# Altium PCB Electronic load HMI 1.0.PcbDoc
Units mil, origin at the board's own origin, x right, y up, seen from the top; angles counter-clockwise.
Board outline 2057.27 x 3159.64 mil, 2 copper layers (Top Layer, Bottom Layer), stack 63.824 mil thick; 86 components, 62 nets, 288 pads, 122 vias.
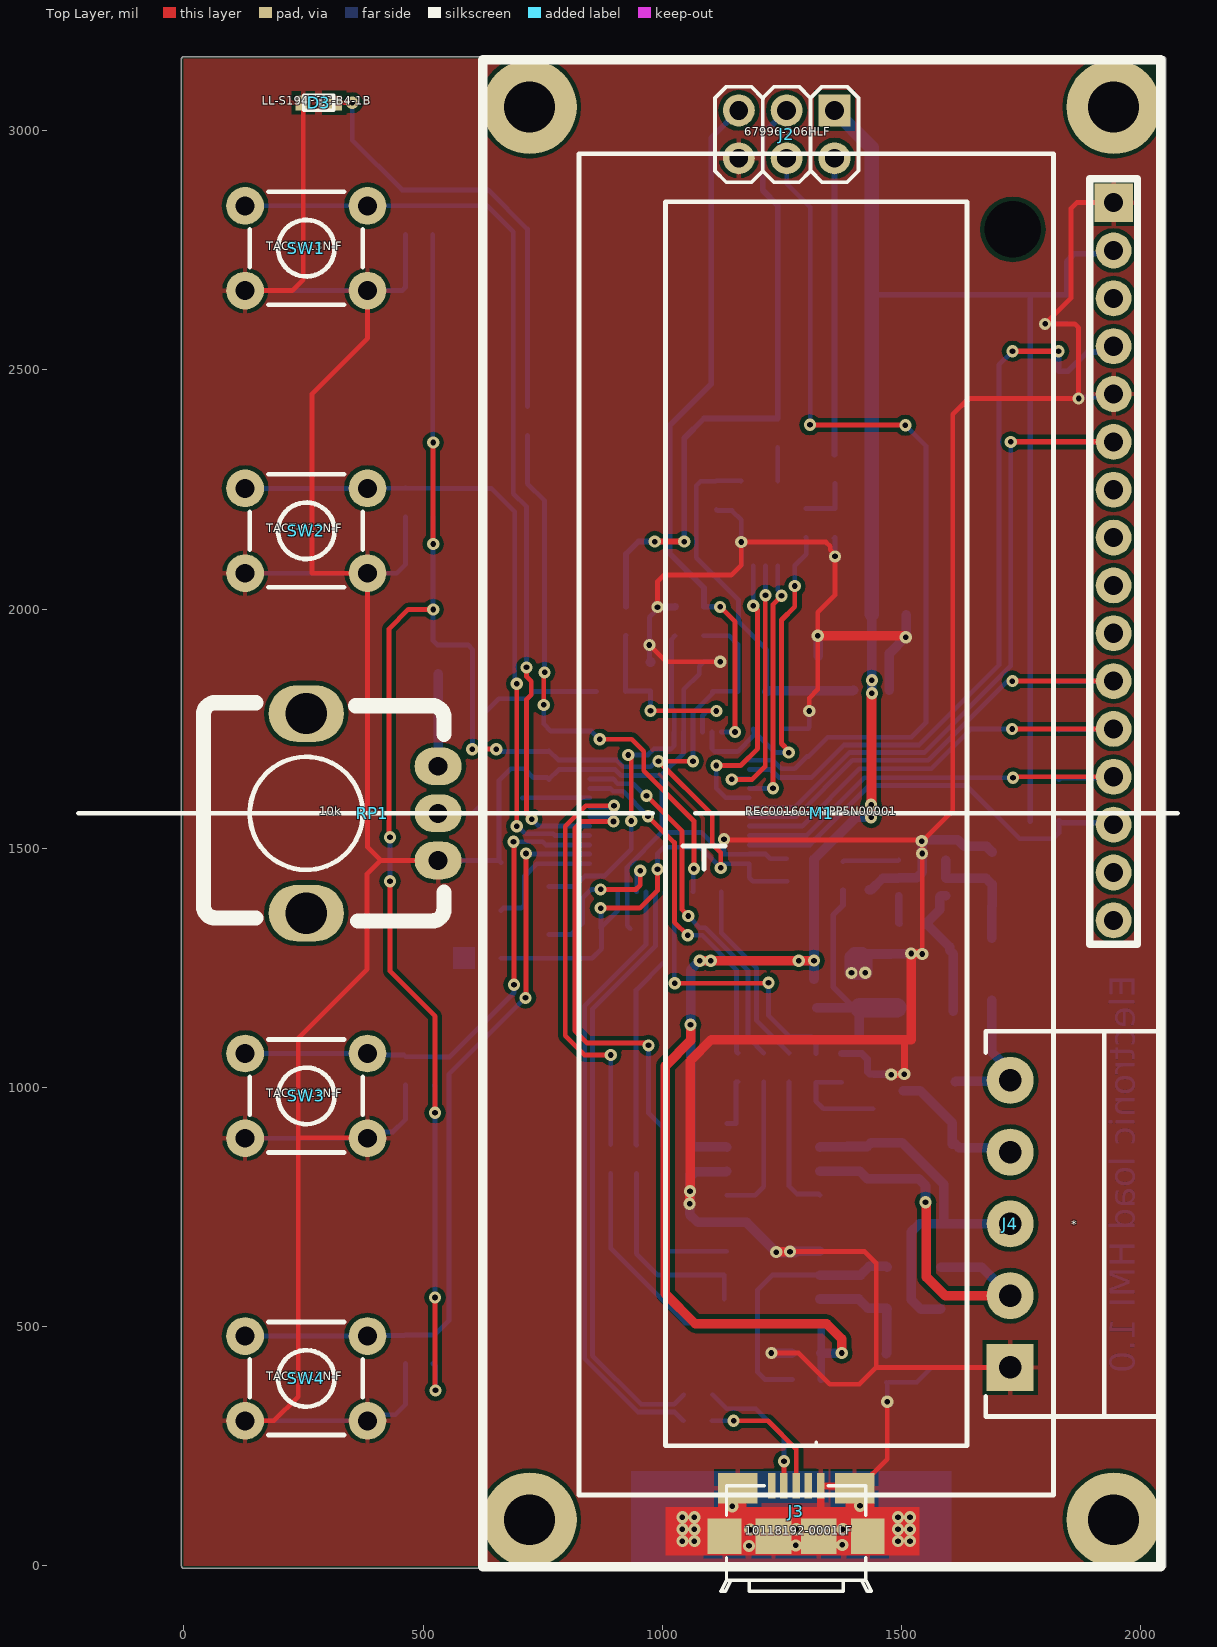
[diagram p0: Top Layer view]
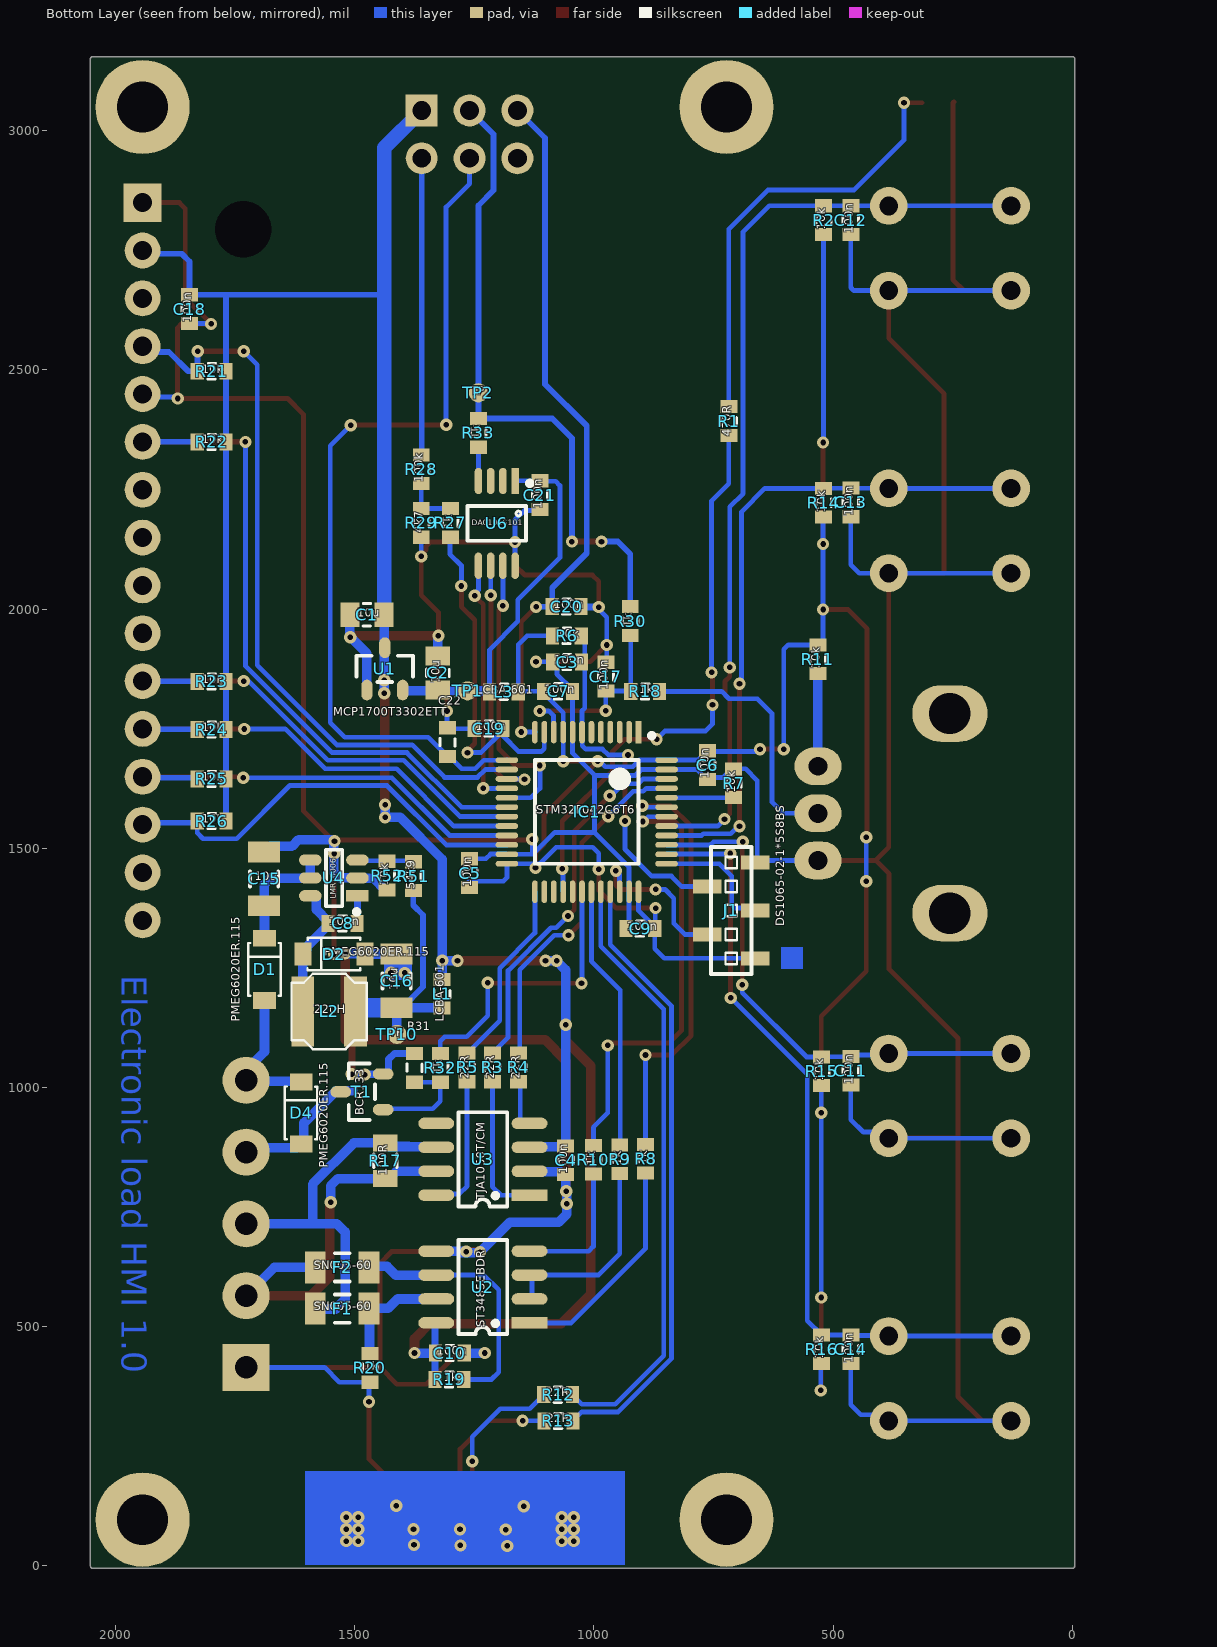
[diagram p1: Bottom Layer view, seen from below]

## Layer stack, top to bottom
Top Solder: solder mask 0.4, Solder Resist, Dk 3.5
Top Layer: signal copper 1.4
Dielectric1: core 61.0236, FR-4, Dk 4.2
Bottom Layer: signal copper 1.4
Bottom Solder: solder mask 0.4, Solder Resist, Dk 3.5

## Board outline
-5.02,0 ccw(c0,0) 0,-5.02 2047.24,-5.02 ccw(c2047.24,0) 2052.26,0 2052.26,3149.61 ccw(c2047.24,3149.61) 2047.24,3154.62 0,3154.62 ccw(c0,3149.61) -5.02,3149.61

## Design rules (kind name [scope] priority, off if disabled: settings)
Clearance kwarc [HasFootprint('X2016')] p1: gap=6 ignorepadtopadclearanceinfootprint=FALSE except(0: Arc-Hole Track-Hole SMDPad-Hole THPad-Hole Via-Hole Fill-Hole Poly-Hole Region-Hole Text-Hole)
Clearance led [HasFootprint('LED1206REV')] p2: gap=5.9 ignorepadtopadclearanceinfootprint=FALSE except(0: Arc-Hole Track-Hole SMDPad-Hole THPad-Hole Via-Hole Fill-Hole Poly-Hole Region-Hole Text-Hole)
Clearance Clearance_1 [(OnLayer('Keep-Out Layer'))] p3: gap=10 ignorepadtopadclearanceinfootprint=FALSE except(0: Arc-Hole Track-Hole SMDPad-Hole THPad-Hole Via-Hole Fill-Hole Poly-Hole Region-Hole Text-Hole)
Clearance Track [istrack vs istrack] p4: gap=6 ignorepadtopadclearanceinfootprint=FALSE except(0: Arc-Hole Track-Hole SMDPad-Hole THPad-Hole Via-Hole Fill-Hole Poly-Hole Region-Hole Text-Hole)
Clearance ANT [InNetClass('ANT')] p5: gap=7.87 ignorepadtopadclearanceinfootprint=FALSE except(0: Arc-Hole Track-Hole SMDPad-Hole THPad-Hole Via-Hole Fill-Hole Poly-Hole Region-Hole Text-Hole)
Clearance poly [inpoly] p6: gap=9 ignorepadtopadclearanceinfootprint=FALSE except(0: Arc-Hole Track-Hole SMDPad-Hole THPad-Hole Via-Hole Fill-Hole Poly-Hole Region-Hole Text-Hole)
Clearance [All] p7: gap=7 ignorepadtopadclearanceinfootprint=FALSE except(0: Arc-Hole Track-Hole SMDPad-Hole THPad-Hole Via-Hole Fill-Hole Poly-Hole Region-Hole Text-Hole)
ComponentClearance ComponentClearance_2 [HasFootprint('CR123')] p1: gap=0 collisioncheckmode=3 verticalgap=0 showdistances=TRUE
ComponentClearance ComponentClearance_1 [HasFootprint('ANT1')] p2: gap=0 collisioncheckmode=3 verticalgap=0 showdistances=TRUE
ComponentClearance [All] p3: gap=0 collisioncheckmode=3 verticalgap=0 showdistances=FALSE
HoleSize [All] p1: absolutevalues=TRUE maxlimit=500 minlimit=10 maxpercent=80.000 minpercent=20.000
PolygonConnect CR123 [HasFootprint('CR123')] p1: connectstyle=Relief reliefconductorwidth=20 reliefentries=4 polygonreliefangle="90 Angle" airgapwidth=10
PolygonConnect coax [HasFootprint('COAXIAL-SWF')] p2: connectstyle=Direct reliefconductorwidth=10 reliefentries=4 polygonreliefangle="90 Angle" airgapwidth=10
PolygonConnect PolygonConnect_1 [isvia] p3: connectstyle=Direct reliefconductorwidth=10 reliefentries=4 polygonreliefangle="90 Angle" airgapwidth=10
PolygonConnect [All] p4: connectstyle=Relief reliefconductorwidth=10 reliefentries=4 polygonreliefangle="90 Angle" airgapwidth=8
RoutingVias [All] p1: holewidth=11.81 width=25.59 viastyle="Through Hole" minholewidth=11.81 minwidth=25.59 maxholewidth=11.81 maxwidth=25.59
SolderMaskExpansion SolderMaskExpansion_1 [isvia] p1: expansion=-100
SolderMaskExpansion [All] p2: expansion=2
Width [All] p1: maxlimit=200 minlimit=6 preferedwidth=10 minimp=50.000000 maximp=50.000000 favimp=50.000000
28 further rules are at their usual default settings.

## Components (designator, comment, footprint, x,y, rotation, side; value= is the part's Value field where it differs from the comment)
C1 "10u" C0805-10 1474.4,1988 r0 bottom
C2 "10u" C0805-10 1326,1866.43 r90 bottom
C3 "100n" C0603 1056,1889 r180 bottom
C4 "100n" C0603 1059,848 r270 bottom
C5 "100n" C0603 1259.84,1448 r270 bottom
C6 "100n" C0603 763,1674 r90 bottom
C7 "100n" C0603 1075,1828 r0 bottom
C8 "100n" C0603 1525.41,1343 r0 bottom
C9 "100n" C0603 903,1332 r180 bottom
C10 "100n" C0603 1300.94,445 r180 bottom
C11 "100n" C0603 463,1035 r270 bottom
C12 "100n" C0603 463,2813 r270 bottom
C13 "100n" C0603 463,2223 r270 bottom
C14 "100n" C0603 463,453 r270 bottom
C15 "10u" C1206 1689.41,1436.1 r90 bottom
C16 "10u" C1206 1412.41,1222.9 r90 bottom
C17 "100n" C0603 975,1858.85 r270 bottom
C18 "100n" C0603 1845,2627 r90 bottom
C19 "100n" C0603 1220,1750 r0 bottom
C20 "100n" C0603 1057,2005 r180 bottom
C21 "100n" C0603 1112.78,2238 r270 bottom
C22 "100n" C0603 1306,1722 r90 bottom
D1 "PMEG6020ER.115" SOD123 1688.41,1247 r270 bottom
D2 "PMEG6020ER.115" SOD123 1543.41,1279 r180 bottom
D3 "LL-S194PBC-B4-1B" LED0603B 282,3058 r180 top
D4 "PMEG6020ER.115" SOD123 1612,946.96 r270 bottom
F1 "SN005-60" F1206 1526.1,538 r0 bottom
F2 "SN005-60" F1206 1526.1,624 r0 bottom
IC1 "STM32F042C6T6" LQFP-48 1015,1576 r270 bottom
J1 "DS1065-02-1*5S8BS" "SIP-5 1.27-SMT -F" 713,1370 r90 bottom
J2 "67996-206HLF" GP2x3 1259.84,2992.13 r180 top locked
J3 "10118192-0001LF" USB-M-H 1279.76,167.31 r0 top
J4 "*" "MC 1,5/5-G-3,81" 1727,1015 r180 top
L1 "LCBA-601" R0603 1317,1196 r90 bottom
L2 "22uH" L4040 1553.29,1159 r180 bottom
L3 "LCBA-601" R0603 1188,1827 r0 bottom
M1 "REC001602AYPP5N00001" LCD16*2 1333,1573 r270 top locked
R1 "470R" R0603 718,2393 r90 bottom
R2 "10k" R0603 520,2812.69 r270 bottom
R3 "22R" R0603 1212,1042 r90 bottom
R4 "22R" R0603 1158,1042 r90 bottom
R5 "22R" R0603 1265,1042 r90 bottom
R6 "10k" R0603 1056.33,1944 r180 bottom
R7 "10k" R0603 708,1636 r270 bottom
R8 "1k" R0603 892,851 r270 bottom
R9 "1k" R0603 946,850 r270 bottom
R10 "1k" R0603 1001,849 r270 bottom
R11 "10k" R0603 532,1895 r90 bottom
R12 "22R" R0603 1075,358 r180 bottom
R13 "22R" R0603 1074,303.31 r180 bottom
R14 "10k" R0603 520,2222.13 r270 bottom
R15 "10k" R0603 524,1034 r270 bottom
R16 "10k" R0603 524,453 r270 bottom
R17 "100R" R0805 1436,847 r90 bottom
R18 "1k" R0603 893,1827.76 r0 bottom
R19 "1k" R0603 1302,390 r180 bottom
R20 "1k" R0603 1468,414 r270 bottom
R21 "10k" R0603 1799,2497 r0 bottom
R22 "10k" R0603 1799,2349.38 r0 bottom
R23 "10k" R0603 1799,1848.72 r0 bottom
R24 "10k" R0603 1799,1748 r0 bottom
R25 "10k" R0603 1799,1645 r0 bottom
R26 "10k" R0603 1799,1557 r0 bottom
R27 "1k" R0603 1300,2180 r90 bottom
R28 "100k" R0603 1360.84,2292.22 r90 bottom
R29 "4k7" R0603 1360.84,2180 r90 bottom
R30 "1k" R0603 924,1975 r270 bottom
R31 "100k" R0603 1375,1041 r270 bottom
R32 "1k" R0603 1321,1041 r270 bottom
R33 "1k" R0603 1241.39,2368 r90 bottom
R51 "54k9" R0603 1377.41,1442 r270 bottom
R52 "10k" R0603 1432.41,1443 r90 bottom
RP1 "10k" RK_POT 255.91,1573 r90 top locked
SW1 "TACT-613N-F" "MSWITCH 13" 255.91,2754.1 r90 top locked
SW2 "TACT-613N-F" "MSWITCH 13" 255.91,2163.55 r90 top locked
SW3 "TACT-613N-F" "MSWITCH 13" 255.91,982.45 r90 top locked
SW4 "TACT-613N-F" "MSWITCH 13" 255.91,391.9 r90 top locked
T1 "BCR133" SOT-23 1484.84,991 r0 bottom
TP1 "TP" TP 1264,1829 r180 bottom
TP2 "TP" TP 1241.39,2452 r180 bottom
TP10 "TP" TP 1411.65,1111 r90 bottom
U1 "MCP1700T3302ETT" SOT-23 1437,1875 r90 bottom
U2 "ST3485EBDR" SO-8 1232,583 r0 bottom
U3 "TJA1050T/CM" SO-8 1232,850 r0 bottom
U4 "LMR16006" SOT-23-6 1543.41,1438 r90 bottom
U6 "DAC101S101" MSOP-8 1203,2179 r270 bottom

## Footprints (in the part's own frame and the unit in brackets; to place one, negate y for a bottom-side part, rotate by r counter-clockwise, add the part's x,y. Pads: shape width x height; smd on the part's side, far side on the other; paste and mask are expansions set on the pad)
C0603 [mm] "Chip Capacitor, Body 1.6x0.8mm, IPC High Density"
  rect 0.7x0.9 smd: 1(-0.762,0) 2(0.762,0)
  silkscreen extent -0.22,-0.41 0.2,0.41, body extent -0.8,-0.4 0.8,0.4, height 0.5
C0805-10 [mm]
  rect 1x1.3 smd: 1(-0.9,0) 2(0.9,0)
  silkscreen extent -0.2,-0.6 0.2,0.6, body extent -1,-0.63 1,0.63, height 1
C1206 [mm]
  rect 1.1x1.7 smd: 1(-1.425,0) 2(1.425,0)
  silkscreen extent -0.4,-0.75 0.4,0.75, body extent -1.6,-0.8 1.6,0.8, height 1
F1206 [mm]
  rect 1.1x1.7 smd: 1(-1.425,0) 2(1.425,0)
  silkscreen extent -0.4,-0.75 0.4,0.75, body extent -1.55,-0.87 1.55,0.87, height 0.7
GP2x3 [mm]
  rect 1.7x1.7 hole 1: 1(-2.54,-1.27)
  round 1.7 hole 1: 2(-2.54,1.27) 3(0,-1.27) 4(0,1.27) 5(2.54,-1.27) 6(2.54,1.27)
  silkscreen extent -3.81,-2.53 3.81,2.54, body extent -3.81,-2.54 3.81,2.54, height 8.52
L4040 [mm]
  rect 1.2x3.7 smd: 1(-1.4,0) 2(1.4,0)
  silkscreen extent -2,-2 2,2, body extent -2,-2 2,2, height 1.1
LCD16*2 [mm]
  round 5 hole 2.7: 0(-37.5,-15.5) 0(-37.5,15.5) 0(37.5,-15.5) 0(37.5,15.5)
  rect 2.032x2.032 hole 1.016: 1(-32.42,15.5)
  round 1.905 hole 1.016: 2(-29.88,15.5) 3(-27.34,15.5) 4(-24.8,15.5) 5(-22.26,15.5) 6(-19.72,15.5) 7(-17.18,15.5) 8(-14.64,15.5) 9(-12.1,15.5) 10(-9.56,15.5) 11(-7.02,15.5) 12(-4.48,15.5) 13(-1.94,15.5) 14(0.6,15.5) 15(3.14,15.5) 16(5.68,15.5)
  silkscreen extent -40,-18 40,18, body extent -40,-18 40,18, height 14.65
LED0603B [mm]
  rect 0.8x0.8 smd mask+0.051: A(-0.825,0) K(0.825,0)
  silkscreen extent -0.8,-0.4 0.8,0.4, body extent -0.8,-0.4 0.8,0.4, height 0.65
LQFP-48 [mm]
  rect 1.2x0.3 smd mask+0.051: 1(-4.237,2.75)
  oval 1.2x0.3 smd mask+0.051: 2(-4.237,2.25) 3(-4.237,1.75) 4(-4.237,1.25) 5(-4.237,0.75) 6(-4.237,0.25) 7(-4.237,-0.25) 8(-4.237,-0.75) 9(-4.237,-1.25) 10(-4.237,-1.75) 11(-4.237,-2.25) 12(-4.237,-2.75) 25(4.237,-2.75) 26(4.237,-2.25) 27(4.237,-1.75) 28(4.237,-1.25) 29(4.237,-0.75) 30(4.237,-0.25) 31(4.237,0.25) 32(4.237,0.75) 33(4.237,1.25) 34(4.237,1.75) 35(4.237,2.25) 36(4.237,2.75)
  oval 0.3x1.2 smd mask+0.051: 13(-2.75,-4.237) 14(-2.25,-4.237) 15(-1.75,-4.237) 16(-1.25,-4.237) 17(-0.75,-4.237) 18(-0.25,-4.237) 19(0.25,-4.237) 20(0.75,-4.237) 21(1.25,-4.237) 22(1.75,-4.237) 23(2.25,-4.237) 24(2.75,-4.237) 37(2.75,4.237) 38(2.25,4.237) 39(1.75,4.237) 40(1.25,4.237) 41(0.75,4.237) 42(0.25,4.237) 43(-0.25,4.237) 44(-0.75,4.237) 45(-1.25,4.237) 46(-1.75,4.237) 47(-2.25,4.237) 48(-2.75,4.237)
  silkscreen extent -4.17,-2.75 2.75,3.57, body extent -4.5,-4.51 4.5,4.49, height 1.56
"MC 1,5/5-G-3,81" [mm]
  rect 2.5x2.5 hole 1.2: 1(0,15.24)
  round 2.5 hole 1.2: 2(0,11.43) 3(0,7.62) 4(0,3.81) 5(0,0)
  silkscreen extent -8,-2.6 1.3,17.84, body extent -8,-2.6 1.3,17.84, height 7.25
MSOP-8 [mm] "MSOP, 8-Leads, Body 3,1x3,1mm (max), Pitch 0,65mm, IPC Medium Density"
  rect 1.4x0.4 smd: 1(-2.25,0.975)
  oval 1.4x0.4 smd: 2(-2.25,0.325) 3(-2.25,-0.325) 4(-2.25,-0.975) 5(2.25,-0.975) 6(2.25,-0.325) 7(2.25,0.325) 8(2.25,0.975)
  silkscreen extent -2.25,-1.55 0.93,1.87, body extent -2.52,-1.55 2.53,1.55, height 1.1
"MSWITCH 13" [mm]
  round 2 hole 1: 1(-2.25,3.25) 1(-2.25,-3.25) 2(2.25,3.25) 2(2.25,-3.25)
  silkscreen extent -3,-3 3,3, body extent -3.1,-3.95 3.1,3.95, height 13
R0603 [mm] "Chip Resistor, Body 1.6x0.8mm, IPC High Density"
  rect 0.7x0.9 smd: 1(-0.762,0) 2(0.762,0)
  silkscreen extent -0.22,-0.41 0.2,0.41, body extent -0.8,-0.4 0.8,0.4, height 0.45
R0805 [mm] "Chip Resistor, Body 2.0x1.3mm, IPC High Density"
  rect 0.9x1.3 smd: 1(-0.95,0) 2(0.95,0)
  silkscreen extent -0.33,-0.61 0.33,0.61, body extent -1,-0.62 1,0.63, height 0.5
RK_POT [mm]
  oval 2x2.5 hole 1: 1(-2.5,-7) 2(0,-7) 3(2.5,-7)
  oval 3x4 hole 2.2: 4(-5.3,0) 5(5.3,0)
  silkscreen extent -5.71,-7.31 5.88,5.46, body extent -5.7,-7.15 5.7,5.5, height 19.91
"SIP-5 1.27-SMT -F" [mil]
  rect 29.13x60 smd: 1(-100,-50) 2(-50,50) 3(0,-50) 4(50,50) 5(100,-50)
  silkscreen extent -133,-42 133,42, body extent -133,-70 133,70, height 187
SO-8 [mil]
  rect 75x24 smd: 1(-97.44,75)
  oval 75x24 smd: 2(-97.44,25) 3(-97.44,-25) 4(-97.44,-75) 5(97.44,-75) 6(97.44,-25) 7(97.44,25) 8(97.44,75)
  silkscreen extent -51,-98 51,98, body extent -123,-98 122,99, height 55
SOD123 [mm]
  rect 0.9x1.2 smd: 1(1.65,0) 2(-1.65,0)
  silkscreen extent -1.4,-0.86 1.4,0.86, body extent -1.85,-0.86 2,0.84, height 1.46
SOT-23 [mm] "SOT23, 3-Leads, Body 3,0x2,5mm (max), Pitch 0,90mm, IPC Medium Density"
  oval 1.1x0.6 smd: 1(-1.125,0.95) 2(-1.125,-0.95) 3(1.125,0)
  silkscreen extent -0.7,-1.5 0.7,1.5, body extent -1.25,-1.5 1.25,1.5, height 1.1
SOT-23-6 [mm]
  rect 0.6x1.2 smd: 1(-0.95,-1.25)
  oval 0.6x1.2 smd: 2(0,-1.25) 3(0.95,-1.25) 4(0.95,1.25) 5(0,1.25) 6(-0.95,1.25)
  silkscreen extent -1.92,-1.33 1.5,0.42, body extent -1.5,-1.58 1.5,1.42, height 1.3
TP [mil]
  round 40 smd paste-100: 1(0,0)
USB-M-H [mm]
  rect 0.4x1.35 smd paste+0 mask+0: 1(-1.3,0) 2(-0.65,0) 3(0,0) 4(0.65,0) 5(1.3,0)
  rect 1.8x1.9 smd paste+0 mask+0: SH(-3.8,-2.675) SH(3.8,-2.675)
  rect 2.1x1.6 smd paste+0 mask+0: SH(-3.1,-0.125) SH(3.1,-0.125)
  rect 1.9x1.9 smd paste+0 mask+0: SH(-1.2,-2.675) SH(1.2,-2.675)
  silkscreen extent -4,-5.6 4,0, body extent -3.96,-5.66 3.96,0, height 2.72

## Part data
C1 C2: library part C-019, "Capacitor: ceramic; MLCC; 10uF; 16V; X5R; ±10%; SMD; 0805", Manufacturer=Samnsung, Part Number=CL21A106KOQNNNG, ComponentLink1Description=Datasheet, ComponentLink1URL=D:\Datasheets\.pdf, ComponentLink2Description=Dostawca, ComponentLink2URL=http://www.tme.eu/pl/katalog/?idp=1&search=CL21A106KOQNNNG, Indeks=C-0019, Supplier=TME, Supplier Code=CL21A106KOQNNNG
C3 C4 C5 C6 C7 C8 C9 C10 C17 C18 C19 C20 C21 C22: library part C-013, "Capacitor: ceramic; 100nF; 50V; X7R; ±10%; SMD; 0603; Series: GRM", Manufacturer=Murata, Part Number=GRM188R71H104KA93D, ComponentLink1Description=Datasheet, ComponentLink1URL=D:\Datasheets\.pdf, ComponentLink2Description=Dostawca, ComponentLink2URL=http://www.tme.eu/pl/katalog/?idp=1&search=GRM188R71H104KA93D, Indeks=C-0013, Supplier=TME, Supplier Code=GRM188R71H104KA93D
C11 C12 C13 C14: library part C, "Kondensator: ceramiczny; MLCC; 100nF; 50V; X7R; ±5%; SMD; 0603", Manufacturer=Samsung, Part Number=CL10B104JB8NNNC, ComponentLink1Description=Datasheet, ComponentLink1URL=D:\Datasheets\.pdf, ComponentLink2Description=Dostawca, ComponentLink2URL=http://www.tme.eu/pl/katalog/?cleanParameters=1&searchClick=1&search=CL10B104JB8NNNC, Supplier=TME, Supplier Code=CL10B104JB8NNNC
C15 C16: library part C-022, "Capacitor: ceramic; 10uF; 35V; X7R; ±10%; SMD; 1206", Manufacturer=Samnsung, Part Number=CL31B106KLHNNNE, ComponentLink1Description=Datasheet, ComponentLink1URL=D:\Datasheets\.pdf, ComponentLink2Description=Dostawca, ComponentLink2URL=http://www.tme.eu/pl/katalog/?idp=1&search=CL31B106KLHNNNE, Indeks=C-0019, Supplier=TME, Supplier Code=CL31B106KLHNNNE
D1 D2 D4: library part STPS2H100A, "Diode: Schottky rectifying; SMD; 60V; 2A; SOD123W", Manufacturer=Nexperia, ComponentLink1Description=Datasheet, ComponentLink1URL=E:\Datasheets\PMEG6020ER.115.pdf, ComponentLink2Description=Dostawca, ComponentLink2URL=http://www.tme.eu/pl/katalog/?idp=1&search=PMEG6020ER.115, Supplier=TME, Supplier Code=PMEG6020ER.115
D3: library part LED_1, "LED; SMD; 0603; blue; 20-40mcd; 1.6x0.8x0.4mm; 130°; 2.8÷3.8V; 20mA", Manufacturer=LuckyLight, ComponentLink1Description=Datasheet, ComponentLink1URL=D:\Datasheets\.pdf, ComponentLink2Description=Dostawca, Part Number=LL-S194PBC-B4-1B, Supplier=TME, Supplier Code=LL-S194PBC-B4-1B
F1 F2: "Bezpiecznik: polimerowy PTC; 50mA; Obud:1206", Manufacturer=ECE, ComponentLink1Description=Datasheet, ComponentLink1URL=D:\Datasheets\ECE.pdf, ComponentLink2Description=Dostawca, ComponentLink2URL=http://www.tme.eu/pl/katalog/?idp=1&search=SN005-60, Part Number=SN005-60, Supplier=TME, Supplier Code=SN005-60
IC1: "ARM microcontroller; Flash:32kB; 48MHz; SRAM:6kB; LQFP48", Manufacturer=ST, Cena100=9,17, Cena 1000=7,9, ComponentLink1Description=Datasheet, ComponentLink1URL=D:\Biznes-projekty\Datasheets\STM32F042C6T6.pdf, ComponentLink2Description=Dostawca, ComponentLink2URL=http://www.tme.eu/pl/katalog/?idp=1&search=STM32F042C6T6, Indeks=IC-080, Part Number=STM32F042C6T6, Supplier=TME, Supplier Code=STM32F042C6T6
J1: library part "CON5_PRG ST", "Socket; pin strips; female; PIN:5; straight; 1.27mm; SMT; 1x5; 1A", Manufacturer=Connfly, ComponentLink1Description=Datasheet, ComponentLink1URL=D:\Datasheets\DS1065-02.pdf, ComponentLink2Description=Dostawca, ComponentLink2URL=http://www.tme.eu/pl/katalog/?idp=1&search=DS1065-02-1*5S8BS, Part Number=DS1065-02-1*5S8BS, Supplier=TME, Supplier Code=DS1065-02-1*5S8BS
J2: library part CON2x3, "Pin header; pin strips; male;2.54mm; PIN:6; THT", Manufacturer=Amphenol, ComponentLink1Description=Datasheet, ComponentLink1URL=D:\Datasheets\.pdf, ComponentLink2Description=Dostawca, Part Number=67996-206HLF, Supplier=TME, Supplier Code=67996-206HLF
J3: library part "USB micro hor", "Socket; USB B micro; on PCBs; SMT; PIN:5; horizontal; V: USB 2.0", Manufacturer=Amphenol, ComponentLink1Description=Datasheet, ComponentLink1URL=D:\Datasheets\10118192-0001LF.pdf, ComponentLink2Description=Dostawca, ComponentLink2URL=http://www.tme.eu/pl/katalog/?idp=1&search=10118192-0001LF/C, Part Number=10118192-0001LF, Supplier=TME, Supplier Code=10118192-0001LF/C
J4: library part CON5, "Z³¹cze", ComponentLink1Description=Datasheet, ComponentLink1URL=D:\Biznes-projekty\Datasheets\.pdf, Indeks=ZL
L1 L3: "Ferrite: bead; Imp.@ 100MHz:600Ohm; Mounting: SMD; 1A; Case:0603", Manufacturer=Ferrocore, ComponentLink1Description=Datasheet, ComponentLink1URL=D:\Datasheets\.pdf, ComponentLink2Description=Dostawca, Indeks=IND, Part Number=LCBA-601, Supplier=TME, Supplier Code=LCBA-601
L2: library part L4040, "Inductor: wire; SMD; 1515; 22uH; 790mA; 0.37R; 4x4x1.65mm", Manufacturer=Murata, Part Number=LQH44PN220MP0L, ComponentLink1Description=Datasheet, ComponentLink1URL=D:\Datasheets\.pdf, ComponentLink2Description=Dostawca, Indeks=IND, Supplier=TME, Supplier Code=LQH44PN220MP0L
M1: library part "OLED 2X16", "Display: OLED; alphanumeric; 16x2; Window dimensions:66x16mm", Manufacturer=RAYSTAR, ComponentLink1Description=Datasheet, ComponentLink1URL=D:\Datasheets\REC001602AYPP5N00001.pdf, ComponentLink2Description=Dostawca, ComponentLink2URL=http://www.tme.eu/pl/katalog/?idp=1&search=REC001602AYPP5N0, Part Number=REC001602AYPP5N00001, Supplier=TME, Supplier Code=REC001602AYPP5N0
R1: library part R-004, "Resistor: thick film; SMD; 0603; 470R; 0.1W; ±5%", Manufacturer="Royal Ohm", Part Number=0603SAJ0471T5E, Tolerance=5%, ComponentLink1Description=Datasheet, ComponentLink1URL=D:\Datasheets\.pdf, ComponentLink2Description=Dostawca, ComponentLink2URL=http://www.tme.eu/pl/katalog/?idp=1&search=SMD0603-470R, Indeks=R-004, Supplier=TME, Supplier Code=SMD0603-470R
R2 R6 R7 R11 R14 R15 R16 R21 R22 R23 R24 R25 R26 R52: library part R-012, "Resistor: thick film; SMD; 0603; 10k; 0.125W; ±5%", Manufacturer=Walsin, Part Number=WF06P103JTL, Tolerance=5%, ComponentLink1Description=Datasheet, ComponentLink1URL=D:\Datasheets\.pdf, ComponentLink2Description=Dostawca, ComponentLink2URL=http://www.tme.eu/pl/katalog/?idp=1&search=WF06P-10K-5%, Indeks=R-011, Supplier=TME, Supplier Code=WF06P-10K-5%
R3 R4 R5 R12 R13: library part R-002, "Resistor: thick film; SMD; 0603; 22R; 0.1W; ±5%;", Manufacturer="Royal Ohm", Part Number=0603SAJ0220T5E, Tolerance=5%, ComponentLink1Description=Datasheet, ComponentLink1URL=D:\Datasheets\.pdf, ComponentLink2Description=Dostawca, ComponentLink2URL=http://www.tme.eu/pl/katalog/?idp=1&search=SMD0603-22R, Indeks=R-002, Supplier=TME, Supplier Code=SMD0603-22R
R8 R9 R10 R18 R19 R20 R27 R30 R32 R33: library part R-005, "Resistor: thick film; SMD; 0603; 1k; 0.1W; ±5%", Manufacturer="Royal Ohm", Part Number=0603SAJ0102T5E, Tolerance=5%, ComponentLink1Description=Datasheet, ComponentLink1URL=D:\Datasheets\.pdf, ComponentLink2Description=Dostawca, ComponentLink2URL=http://www.tme.eu/pl/katalog/?idp=1&search=SMD0603-1K, Indeks=R-004, Supplier=TME, Supplier Code=SMD0603-1K
R17: library part R-017, "Resistor: thick film; SMD; 0805; 100R; 0.125W; ±1%", Manufacturer="Royal Ohm", Part Number=CRCW0805100RFKTABC, Tolerance=1%, ComponentLink1Description=Datasheet, ComponentLink1URL=D:\Datasheets\.pdf, ComponentLink2Description=Dostawca, ComponentLink2URL=http://www.tme.eu/pl/katalog/?idp=1&search=CRCW0805100RFKTABC, Indeks=R-015, Supplier=TME, Supplier Code=CRCW0805100RFKTABC
R28 R31: library part R-013, "Resistor: thick film; SMD; 0603; 100k; 0.125W; ±5%", Manufacturer=Walsin, Part Number=WF06P104JTL, Tolerance=5%, ComponentLink1Description=Datasheet, ComponentLink1URL=D:\Datasheets\.pdf, ComponentLink2Description=Dostawca, ComponentLink2URL=http://www.tme.eu/pl/katalog/?idp=1&search=WF06P-100K-5%, Indeks=R-011, Supplier=TME, Supplier Code=WF06P-100K-5%
R29: library part R-011, "Resistor: thick film; SMD; 0603; 4.7k; 0.125W; ±5%", Manufacturer=Walsin, Part Number=WF06P472JTL, Tolerance=5%, ComponentLink1Description=Datasheet, ComponentLink1URL=D:\Datasheets\.pdf, ComponentLink2Description=Dostawca, ComponentLink2URL=http://www.tme.eu/pl/katalog/?idp=1&search=WF06P-4K7-5%, Indeks=R-011, Supplier=TME, Supplier Code=WF06P-4K7-5%
R51: library part R-016, "Resistor: thick film; SMD; 0603; 54.9k; 0.1W; ±1%;", Manufacturer=Yageo, Part Number=RC0603FR-0754K9L, Tolerance=1%, ComponentLink1Description=Datasheet, ComponentLink1URL=D:\Datasheets\.pdf, ComponentLink2Description=Dostawca, ComponentLink2URL=http://www.tme.eu/pl/katalog/?idp=1&search=RC0603FR-0754K9L, Indeks=R-016, Supplier=TME, Supplier Code=RC0603FR-0754K9L
RP1: library part POT, "Potentiometer: shaft; balance, single turn, vertical; 10kOhm; ±20%", Manufacturer=Alps, Part Number=RK09K1130081, ComponentLink1Description=Datasheet, ComponentLink1URL=D:\Datasheets\.pdf, ComponentLink2Description=Dostawca, ComponentLink2URL=http://www.tme.eu/pl/katalog/?idp=1&search=RK09K1130081, Supplier=TME, Supplier Code=RK09K1130081
SW1 SW2 SW3 SW4: library part MSWITCH, "Mikroprze³acznik; 1-pozycyjne; SPST-NO; 0,05A/12VDC; THT; 1,6N", ComponentLink1Description=Datasheet, ComponentLink1URL=D:\Datasheets\.pdf, ComponentLink2Description=Dostawca, ComponentLink2URL=http://www.tme.eu/pl/katalog/?idp=1&search=, Supplier=TME, Supplier Code=TACT-613N-F
T1: "NPN Silicon Digital Transistor 10kOhm", Manufacturer=Infineon, Part Number=BCR133E6327, ComponentLink1Description=Datasheet, ComponentLink1URL=D:\Datasheets\BCR133.pdf, ComponentLink2Description=Dostawca, ComponentLink2URL=http://www.tme.eu/pl/katalog/?idp=1&search=BCR133E6327, Supplier=TME, Supplier Code=BCR133E6327
TP1 TP2 TP10: "Test point", ComponentLink1Description=Datasheet, ComponentLink1URL=D:\Datasheets\.pdf, ComponentLink2Description=Dostawca
U1: library part MCP1700, "Micropower 3.3V 250mA LDO Regulator", Manufacturer=Microchip, ComponentLink1Description=Datasheet, ComponentLink1URL=E:\Datasheets\.Mcp1700.pdf, ComponentLink2Description=Dostawca, ComponentLink2URL=http://www.tme.eu/pl/katalog/?idp=1&search=MCP1700T3302ETT, Part Number=MCP1700T3302ETT, Supplier=TME, Supplier Code=MCP1700T3302ETT
U2: library part MAX3485, "Nadajnik-odbiornik linii; RS422 / RS485; 3,3VDC; SO8", Manufacturer=ST, ComponentLink1Description=Datasheet, ComponentLink1URL=D:\Datasheets\.pdf, ComponentLink2Description=Dostawca, Part Number=ST3485EBDR, Supplier=TME, Supplier Code=ST3485EBD
U3: library part TJA1050T, "High speed CAN transceiver", Manufacturer=NXP, ComponentLink1Description=Datasheet, ComponentLink1URL=D:\Datasheets\TJA1050.pdf, ComponentLink2Description=Dostawca, ComponentLink2URL="http://www.tme.eu/pl/katalog/?idp=1&search= TJA1050T/CM", Part Number=TJA1050T/CM, Supplier=TME, Supplier Code=TJA1050T/CM
U4: "60 V 0.6 A Buck Regulators With High Efficiency ECO  Mode", Manufacturer=ST, Part Number=LMR16006XDDCR, ComponentLink1Description=Datasheet, ComponentLink1URL=E:\Datasheets\lmr16006.pdf, ComponentLink2Description=Dostawca, ComponentLink2URL=http://pl.farnell.com/search?st=2781719, Supplier=Farnell, Supplier Code=2781719
U6: "D/A converter; 10bit; Channels:4; 2.7÷5.5VDC; MSOP8", Manufacturer=TI, Part Number=DAC101S101CIMM/NOPB, ComponentLink1Description=Datasheet, ComponentLink1URL=e:\Datasheets\dac101s101.pdf, ComponentLink2Description=Dostawca, ComponentLink2URL=https://pl.mouser.com/Search/Refine?Keyword=DAC101S101CIMM%2fNOPB, Supplier=Mouser, Supplier Code=926-DA101S101CIMMNPB

## Free pads (board coordinates)
  round 60 hole 118.11 unplated: 2(1732.66,2793.47)

## Via types
v1: diameter 25.59, hole 11.81, Top Layer to Bottom Layer, 122 vias

## Nets (pads, with @x,y where several pads share a name; then routed paths per layer and width w, separated by ;. In a path a pad name is that pad's centre, name@x,y a point inside that pad or via, vN(x,y) a via of type N, cw(c..) or ccw(c..) an arc to the next point about the centre after c; other vN are vias at no path point)
485_DIR: IC1.31 R9.1 | length 554.4
  Bottom Layer w10: R9.1 945.14,880.86 945.14,1203.63 1005.16,1263.65 IC1.31
485_RX: IC1.43 R8.1 | length 908.5
  Top Layer w10: v1(892,1068.02) 836.98,1068.02 797,1108 797,1546 840,1589 v1(899,1589)
  Bottom Layer w10: IC1.43 888.16,1585.84 888.33,1586.02 896.02,1586.02 v1(899,1589) ; R8.1 v1(892,1068.02)
485_TX: IC1.42 R10.1 | length 952.1
  Top Layer w10: v1(898,1556) 831,1556 817,1542 817,1119 843.19,1092.81 966.19,1092.81 v1(971,1088)
  Bottom Layer w10: IC1.42 848.52,1565.81 886.73,1565.81 894.54,1558 896,1558 v1(898,1556) ; v1(971,1088) 971,947 1001,917 R10.1
+3V3: C2.1 C21.1 L3.2 TP1.1 U1.2 U6.1 | length 773.1
  Bottom Layer w10: U6.1 1164.2,2268 C21.1 1111.84,2267.06 1080.06,2267.06 1071,2258 1071,2106.98 1159,2018.98 1159,1974 1218,1915 L3.2
  Bottom Layer w20: L3.2 1219.85,1828.85 1326,1828.85 1397.93,1828.85 1399.6,1830.53 U1.2
+5V: C1.1 C4.1 C10.1 C18.2 J2.1 L1.2 M1.2 R19.1 R21.1 R22.1 R23.1 R24.1 R25.1 R26.1 U1.3 U2.8 U3.3 | length 5579.4
  Top Layer w20: v1(1059,1131) 1059,1098 1006.33,1045.33 1006.33,568.67 1068.74,506.26 1343.44,506.26 1375,474.7 v1(1375,445) ; v1(1078,1265) 1078.13,1265.13 v1@1101.13,1265.13 ; v1(1101,1265) v1@1101.13,1265.13 ; v1(1317,1265.25) 1316.94,1265.19 v1(1285,1265.13) v1(1285,1265.13) v1@1101.13,1265.13 ; v1(1436.35,1564.49) v1(1436.35,1591) 1437.17,1591.83 1437.17,1823.29 v1(1438,1824.12)
  Bottom Layer w12: 1437.87,2660 1440.87,2657 1769,2657 ; R26.1 R25.1 R24.1 R23.1 R22.1 R21.1 1769,2657 ; M1.2 1936.59,2742.74 1861.27,2742.74 1845,2726.47 C18.2 1769,2657
  Bottom Layer w15: U2.8 1332,505.44 1332,445 R19.1
  Bottom Layer w20: v1(1101,1265) v1(1078,1265) 1059,1246 v1(1059,1131) C4.1 1061.23,875.77 1133.79,875.77 U3.3 ; v1(1285,1265.13) v1@1316.5,1265.13 ; L1.2 v1(1317,1265.25) 1317,1477.06 1404.43,1564.49 v1(1436.35,1564.49) v1(1436.35,1591) ; C10.1 1332,445 v1(1375,445) ; C1.1@1437.87,1989 1437.93,1988.93 1437.93,1851.07 v1(1438,1851) v1(1438,1824.12)
  Bottom Layer w30: J2.1 1437.87,2964.1 1437.87,2660 C1.1@1437.87,1989
+12V: D1.1 D4.2 J4.5 | length 299.3
  Bottom Layer w20: D4.2 1613.54,1013.46 1725.46,1013.46 J4.5 1727,1036.22 1688.41,1074.81 D1.1
A: F2.2 J4.2 R17.1 U3.7 | length 785.2
  Top Layer w20: v1(1550,760) 1552,758 1552,604 1591,565 J4.2
  Bottom Layer w20: U3.7 1412.72,825 1428.13,809.6 R17.1 1535.4,809.6 1550,795 v1(1550,760) ; F2.2 1668,624 J4.2
B: F1.2 J4.3 R17.2 U3.6 | length 807.2
  Bottom Layer w20: U3.6 1330.21,875.77 1385.77,875.77 1386.69,876.68 1428.28,876.68 R17.2 1501.6,884.4 1588,798 1588,715 ; F1.2 1581.2,537 1540,537 1520,557 1520,698 1537,715 1588,715 ; J4.3 1588,715
CAN_RX: IC1.45 R4.2 | length 736.4
  Top Layer w10: v1(970,1567) 1025.2,1511.8 1025.2,1345.8 v1(1053,1318)
  Bottom Layer w10: IC1.45 890.79,1625.21 897,1619 918,1619 v1(970,1567) ; v1(1053,1318) 1083.07,1318 1155,1246.07 1155,1075 R4.2
CAN_STBY: IC1.25 R5.2 | length 395.9
  Bottom Layer w10: IC1.25 1123.27,1323.05 1197,1249.32 1197,1140 R5.2
CAN_TX: IC1.46 R3.2 | length 779.3
  Top Layer w10: v1(967,1610) 1041.2,1535.8 1041.2,1371.41 v1(1054,1358.61)
  Bottom Layer w10: IC1.46 897.1,1644.9 907,1635 939,1635 964,1610 v1(967,1610) ; v1(1054,1358.61) 1078.61,1334 1089.69,1334 1179.25,1244.44 1179.25,1104.75 R3.2
DB4: IC1.19 M1.11 R23.2 | length 993.7
  Top Layer w10: v1(1731.63,1849.38) M1.11
  Bottom Layer w10: IC1.19@1182.17,1566.5 IC1.19 1279.61,1566.16 1397.33,1683.88 1555.88,1683.88 1721.38,1849.38 v1(1731.63,1849.38)
  Bottom Layer w12: R23.2 1829.33,1849.05 1942.91,1849.05 M1.11
DB5: IC1.20 M1.12 R24.2 | length 960.3
  Top Layer w10: v1(1731,1749.38) M1.12
  Bottom Layer w10: IC1.20 1292.47,1546.47 1412,1666 1561.9,1666 1645.27,1749.38 v1(1731,1749.38)
  Bottom Layer w12: R24.2 1829.69,1748.69 1942.55,1748.69 M1.12
DB6: IC1.21 M1.13 R25.2 | length 928.2
  Top Layer w10: v1(1733,1647.19) 1735.19,1649.38 M1.13
  Bottom Layer w10: IC1.21 1301.79,1526.79 1422.19,1647.19 v1(1733,1647.19)
  Bottom Layer w12: R25.2 1831.19,1647.19 1941.05,1647.19 M1.13
DB7: IC1.22 M1.14 R26.2 | length 892
  Bottom Layer w10: IC1.22 1308.56,1507.1 1432.65,1631.19 1635.62,1631.19 1746.81,1520 1817,1520 1829,1532 R26.2
  Bottom Layer w12: R26.2 1832.81,1553.19 1939.43,1553.19 M1.14
DOWN: C13.1 IC1.40 R14.1 SW2.2 | length 1411.3
  Top Layer w10: v1(695.69,1546.22) v1(695.69,1843.84)
  Bottom Layer w10: SW2.2@127.95,2252.13 383.86,2252.13 384.29,2252.57 462.57,2252.57 C13.1 463.43,2252.57 519.57,2252.57 R14.1 642.87,2252.13 691.44,2203.56 691.44,1848.08 v1(695.69,1843.84) v1@695.69,1851.15 ; v1(695.69,1546.22) 698.16,1546.22 713.91,1530.47 771.53,1530.47 775.21,1526.79 IC1.40
EN: IC1.18 M1.6 R22.2 | length 1466.2
  Top Layer w12: v1(1728.38,2349.38) M1.6
  Bottom Layer w10: IC1.18 1276.56,1585.84 1390.71,1700 1547.18,1700 1728.38,1881.2 v1(1728.38,2349.38)
  Bottom Layer w12: R22.2 M1.6
ESC: C14.1 IC1.38 R16.1 SW4.2 | length 1612
  Top Layer w10: v1(714,1187.25) 714.8,1188.05 714.8,1488.8 v1(715,1489)
  Bottom Layer w10: SW4.2@127.95,480.48 383.86,480.48 385.12,481.74 461.74,481.74 C14.1 R16.1@520,483 ; R16.1 554,513 554,1027.25 v1(714,1187.25) ; v1(715,1489) 716.24,1487.76 847.83,1487.76 IC1.38
GND: C1.2 C2.2 C3.1 C4.2 C5.1 C6.1 C7.1 C9.1 C10.2 C11.2 C12.2 C13.2 C14.2 C15.2 C16.2 C17.1 C18.1 C19.2 C20.2 C21.2 C22.2 D2.1 D3.K IC1.8 IC1.23 IC1.35 IC1.47 J1.5 J2.6 J3.5 J3.SH J4.1 M1.1 M1.5 R7.1 R20.2 R29.1 R31.1 R52.1 RP1.1 SW1.1 SW2.1 SW3.1 SW4.1 T1.2 U1.1 U2.5 U3.2 U4.2 U6.8 | length 15863.4
  Top Layer w10: SW4.1@127.95,303.31 188.31,303.31 239,354 239,895 ; SW1.1@127.95,2665.52 226.52,2665.52 249.52,2688.52 D3.K D3.K@247.52,3060 ; SW3.1@383.86,893.87 382.72,895 239,895 ; SW1.1@383.86,2665.52 383.86,2565.86 268,2450 268,2074.97 383.86,2074.97 383.86,1502 411.28,1474.57 ; RP1.1 411.28,1474.57 ; v1(973,1925) 1008,1890 v1(1121,1890) ; v1(990,2004) 990,2058 1003,2071 1144,2071 1165,2092 v1(1165,2140) 1342,2140 1350.79,2131.21 1350.79,2124.27 1360.84,2114.22 v1(1360.84,2110) 1360.84,2028.84 1325,1993 v1(1325,1944) 1325,1832 1307,1814 v1(1307,1787) ; v1(1129,1519) 1130.98,1517.02 1540.02,1517.02 v1(1542,1515.04) ; v1(1228,445) 1285,445 1350,380 1412,380 1447,415 ; v1(1267,657) 1423,657 1447,633 1447,415 ; v1(1413.14,126) 1413.14,160.9 1413.14,166.14 1470,223 v1(1470,343) ; v1(1543.41,1279) 1543.41,1514.41 1607,1578 1607,2407 1640,2440 v1(1870,2440) 1870,2588 1862,2596 v1(1800,2596) 1854,2650 1854,2837 1866.38,2849.38 M1.1 ; J4.1 1447,415 ; 239,895 239,1103 383,1247 383,1446.29 411.28,1474.57
  Top Layer w15: J3.SH@1327,62 1330.94,65.94 J3.5 1396.88,167.31 J3.SH@1401.8,162.39 ; v1(1478.59,1027) 1479.09,1027.5 1505.34,1027.5 v1(1505.84,1028) 1505.84,1094.45 1500.3,1100 ; v1@1479.5,1029.5 v1@1480,1030
  Top Layer w20: v1(1057,757) 1057.5,757.5 1057.5,782.5 v1(1058,783) 1058,1055.76 1102.24,1100 1500.3,1100 1520,1100 v1(1520,1280) 1520.5,1279.5 1542.91,1279.5 v1(1543.41,1279) ; v1(1238,656) 1238.5,656.5 1266.5,656.5 v1(1267,657) ; v1(1325,1944) 1504.49,1944 1507.49,1941 v1(1509,1941)
  Top Layer w60: J3.SH@1157.71,162.39 1147.87,162.39 1146.37,160.9 v1(1146.37,125) 1146.37,80.19 1130.15,63.97 1130.15,62 1232.51,62 1327,62 1429.36,62 1429.36,63.97 1413.14,80.19 v1(1413.14,126) ; J3.SH@1401.8,162.39 1411.65,162.39 J3.SH@1413.14,160.9
  Bottom Layer w10: SW4.1@127.95,303.31 383.86,303.31 396.54,316 442,316 463,337 C14.2 ; SW3.1@127.95,893.87 383.86,893.87 397.01,907.02 437.02,907.02 463,933 C11.2 ; SW2.1@127.95,2074.97 383.86,2074.97 444.97,2074.97 463,2093 C13.2 ; SW1.1@127.95,2665.52 383.86,2665.52 456.52,2665.52 463,2672 C12.2 ; RP1.1 J1.5@658.43,1474.57 ; J1.5 J1.5@658.43,1474.57 ; C9.1 926.76,1338.24 926.76,1408.83 IC1.35 926.42,1460.48 999,1533.07 ; C17.1 973,1890.85 v1(973,1925) 973,1982.78 990,1999.78 v1(990,2004) ; C21.2 1114.87,2205.91 1145.5,2205.91 1165,2186.4 v1(1165,2140) 1164.81,2139.81 1164.81,2090.61 U6.8 ; v1(1121,1890) 1087,1890 C3.1 1077.22,1880.22 1077.22,1864.16 1045,1831.94 C7.1 1044.76,1827.76 1044.76,1743.06 IC1.8 1044.53,1698.95 999,1653.42 999,1652 ; v1(1129,1519) 1129,1489 1127.42,1487.42 ; C19.2 1306,1750 C22.2 1307,1753 v1(1307,1787) ; C5.1 1225.57,1478 1215.81,1487.76 1182.17,1487.76 IC1.23 1127.42,1487.42 ; R29.1@1359,2148.16 R29.1 v1(1360.84,2110) ; R20.2 R20.2@1470,382 ; v1(1470,343) R20.2@1470,382 ; J4.1 1563,415 1532,384 1472,384 R20.2@1470,382 ; v1(1800,2596) 1800.5,2596.5 1844.5,2596.5 C18.1 ; v1(1870,2440) 1872.98,2442.98 1936.84,2442.98 M1.5 ; J1.5@658.43,1474.57 658.43,1641.43 683,1666 R7.1 711.94,1666 730.28,1647.65 759.35,1647.65 C6.1 783.58,1664.58 IC1.47 901.56,1664.58 914.14,1652 999,1652 ; 999,1533.07 1081.77,1533.07 1127.42,1487.42 ; 999,1533.07 999,1652
  Bottom Layer w15: v1(990,2004) 990.5,2004.5 1026.5,2004.5 C20.2 ; R31.1 1417,1071 1429.06,1058.94 1429.06,1032.38 1433.04,1028.4 T1.2 1441.25,1027.7 1477.89,1027.7 v1(1478.59,1027) ; v1@1478.23,1029.03 1479.25,1028 v1(1505.84,1028)
  Bottom Layer w20: C17.1 C17.1@975.5,1889.35 ; v1@1057,782 v1(1057,757) 1057,735 1074,718 1176,718 v1(1238,656) 1239,655 v1@1278,655 ; v1(1058,783) 1058.5,783.5 1058.5,817.5 C4.2 1062.94,818 1069.17,824.23 1133.79,824.23 U3.2 ; v1(1228,445) C10.2 ; v1(1267,657) 1267.5,657.5 1328.94,657.5 U2.5 ; v1(1325,1944) 1326,1943 C2.2 ; C16.2 1417.35,1279 D2.1 1478.95,1279.5 v1@1519.5,1279.5 ; R52.1 1436.35,1413 1460.65,1437.31 1493.5,1437.31 U4.2 1494.89,1438.69 1531.69,1438.69 1543.41,1450.41 1543.41,1513.63 v1(1542,1515.04) 1544.96,1518 1617,1518 1631.14,1503.86 1677.76,1503.86 C15.2 ; U1.1 1474.4,1907.4 1509.83,1942.83 C1.2 ; v1(1520,1280) v1@1519.5,1279.5 ; v1(1543.41,1279) 1542.91,1279.5 v1@1519.5,1279.5
  Bottom Layer w30: C16.2 1402.18,1279 1395.53,1272.35 v1(1395.53,1239.53) 1423.62,1239.53 v1(1424,1239.91) 1424,1272.35 C16.2@1417.35,1279
  other v1: 1181.21,42 1279,43 1376,44 1042,52 1067,52 1492.51,52 1517.51,52 1184,76 1042,77 1067,77 1280,77 1377,77 1492.51,77 1517.51,77 1042,102 1067,102 1492.51,102 1517.51,102 1542.91,1489
I_SUM: C20.1 IC1.12 J2.5 | length 1464.4
  Top Layer w10: v1@1120.53,2004.75 v1(1120.78,2004.5) 1152,1973.28 v1(1152,1743.17)
  Bottom Layer w10: IC1.12 1123.61,1743.17 v1(1152,1743.17)
  Bottom Layer w12: v1(1120.78,2004.5) 1120.53,2004.75 1087.25,2004.75 C20.1 1087,2044.58 1015,2116.58 1015,2383 1102,2470 1102,2984.28 J2.5
IPROG: J2.3 R30.1 R33.2 TP2.1 | length 1349
  Top Layer w12: v1(984.27,2141) v1(1046,2141)
  Bottom Layer w12: R30.1 924,2115 950,2141 v1(984.27,2141) ; v1(1046,2141) 1046,2357 1087,2398 R33.2 TP2.1 1241.39,2843.61 1209.84,2875.16 1209.84,2992.13 J2.3
MOSI: IC1.17 U6.7 | length 611.8
  Top Layer w10: v1(1113,1673) 1164,1673 1199,1708 1199,1998 v1(1190.2,2006.8)
  Bottom Layer w10: v1(1113,1673) 1112.78,1672.78 1112.78,1625 1132.25,1605.53 IC1.17 ; v1(1190.2,2006.8) U6.7
NetC8_1: C8.1 U4.1 | length 58.1
  Bottom Layer w15: U4.1 1494.2,1344.21 C8.1
NetC8_2: C8.2 D2.2 L2.1 U4.6 | length 285.3
  Bottom Layer w20: U4.6 1581.79,1400.6 1580.12,1398.93 1580.12,1371.65 1555.41,1346.94 C8.2 1555.41,1339.06 1600.65,1293.82 1600.65,1286.72 D2.2 L2.1
NetC15_1: C15.1 D1.2 U4.4 U4.5 | length 252.8
  Bottom Layer w20: U4.4 U4.5 1593.32,1437.31 1676.69,1437.31 1689.41,1424.59 C15.1 1688.41,1379 D1.2
NetC16_1: C16.1 L1.1 L2.2 R51.2 TP10.1 | length 506.1
  Bottom Layer w12: R51.2 1377.41,1380.91 1357,1360.5 1357,1210.39 1400.6,1166.8 C16.1
  Bottom Layer w20: L1.1@1323,1166.8 C16.1@1400.6,1166.8 ; TP10.1@1412,1111 1412,1166.39 C16.1 ; L2.2@1490.38,1166.8 L2.2
  Bottom Layer w40: C16.1 L2.2@1490.38,1166.8
NetD3_A: D3.A R1.2 | length 929.6
  Top Layer w10: D3.A v1(352,3058)
  Bottom Layer w10: v1(352,3058) 352,2980 456,2876 636,2876 718,2794 R1.2
NetD4_1: D4.1 J4.4 T1.3 | length 302.6
  Bottom Layer w20: 1503.29,993 1539.3,993 1606.09,926.21 1606.09,882 D4.1 1619.72,874.28 1717.72,874.28 J4.4
NetF1_1: F1.1 R20.1 U2.7 | length 243.7
  Bottom Layer w20: U2.7 1410.36,558 1429.36,539 1469,539 F1.1 1469,537 1469,445 R20.1
NetF2_1: F2.1 R19.2 U2.6 | length 543.3
  Bottom Layer w10: R19.2 1214,390 1199,405 1199,577 1230,608 U2.6
  Bottom Layer w20: U2.6 1414.41,608 1432.41,626 1468,626 F2.1
NetIC1_44: IC1.44 R7.2 | length 140.5
  Bottom Layer w10: R7.2@708,1605.18 708.61,1605.8 847.91,1605.8 IC1.44
NetJ3_2: J3.2 R12.1 | length 288.3
  Top Layer w10: J3.2 v1(1254.17,219)
  Bottom Layer w10: R12.1 1134.5,328.5 1195.67,328.5 1254.17,270 v1(1254.17,219)
NetJ3_3: J3.3 R13.1 | length 277.2
  Top Layer w10: v1(1149,303.31) 1220.85,303.31 1279.76,244.41 J3.3
  Bottom Layer w10: R13.1 v1(1149,303.31)
NetR3_1: R3.1 U3.1 | length 303.9
  Bottom Layer w10: U3.1 1194,775 1212,793 R3.1
NetR4_1: R4.1 U3.4 | length 110.4
  Bottom Layer w10: U3.4 1154.06,925 1154.06,1012 R4.1
NetR5_1: R5.1 U3.8 | length 290.3
  Bottom Layer w10: R5.1 1265,794 1281.32,777.68 1326.76,777.68 U3.8
NetR8_2: R8.2 U2.1 | length 474.8
  Bottom Layer w10: R8.2 892,663.68 1047.69,508 U2.1 U2.1@1145,508
NetR9_2: R9.2 U2.2 U2.3 | length 419.5
  Bottom Layer w10: R9.2 946,652.5 990.5,608 1129.56,608 U2.2@1129.56,558
NetR10_2: R10.2 U2.4 | length 288.7
  Bottom Layer w10: R10.2 1001,668 1011,658 U2.4
NetR11_1: R11.1 RP1.3 | length 193.8
  Bottom Layer w20: RP1.3 531.75,1671.68 531.75,1864.75 R11.1
NetR18_1: R18.1 RP1.2 | length 545.7
  Bottom Layer w10: RP1.2 604.09,1573 627.91,1596.83 627.91,1782.41 658.15,1812.64 717.64,1812.64 732.76,1827.76 R18.1
NetR27_2: R27.2 R28.1 R29.2 | length 113.1
  Bottom Layer w10: R27.2 R29.2 R28.1
NetR31_2: R31.2 R32.2 T1.1 | length 219.7
  Bottom Layer w10: R31.2 R32.2 1321,971.44 1336.84,955.6 T1.1@1440.55,955.6
NetR33_1: R33.1 U6.4 | length 70.4
  Bottom Layer w10: U6.4 R33.1
NetR51_1: R51.1 R52.2 U4.3 | length 118.2
  Bottom Layer w10: R51.1 1379.11,1473.7 1492.5,1473.7 U4.3
OK: C11.1 IC1.39 R15.1 SW3.2 | length 1098.3
  Top Layer w10: v1(689,1513.63) 690,1512.63 v1(690,1215)
  Bottom Layer w10: SW3.2@127.95,1071.03 383.86,1071.03 386.87,1068.02 459.98,1068.02 C11.1 463.5,1064.5 523.5,1064.5 R15.1 555.68,1064 690,1198.32 v1(690,1215) ; v1(689,1513.63) 689.16,1513.8 749.99,1513.8 756.69,1507.1 IC1.39
OUT1: IC1.30 R32.1 | length 604
  Top Layer w10: v1(1026,1218) 1221,1218 v1(1222,1219)
  Bottom Layer w10: IC1.30 1024.84,1219.49 1026,1218.33 v1(1026,1218) ; v1(1222,1219) 1222,1150 1266,1106 1312,1106 1321,1097 R32.1
RESET: C3.2 IC1.7 J1.4 R6.2 | length 742.5
  Top Layer w10: v1(928.83,1695) 935,1688.83 v1(935,1557)
  Bottom Layer w10: J1.4 816,1420 838,1442 879,1442 935,1498 v1(935,1557) ; v1(928.83,1695) 969.93,1695 982.14,1707.2 1017.21,1707.2 1024.5,1714.49 1024.5,1742.48 IC1.7 1024.84,1787.16 1019.22,1792.78 1019.22,1936.89 R6.2
RS: IC1.14 M1.4 R21.2 | length 1568.2
  Top Layer w12: v1(1732,2539) v1(1828,2539)
  Bottom Layer w10: IC1.14 1227.14,1664.58 1243.55,1648.18 1312.18,1648.18 1380,1716 1537,1716 1703.58,1882.58 1703.58,2510.58 v1(1732,2539)
  Bottom Layer w12: v1(1828,2539) 1828.5,2538.5 1828.5,2497.5 R21.2 1848,2497 1888.32,2537.32 1931.18,2537.32 M1.4
SCLK: IC1.15 U6.6 | length 538.1
  Top Layer w10: v1(1145,1644) 1188,1644 1215,1671 1215,2028.2 v1(1215.8,2029)
  Bottom Layer w10: v1(1145,1644) 1145.55,1644.55 1181.48,1644.55 IC1.15 ; v1(1215.8,2029) U6.6
STAT: IC1.28 R1.1 | length 1189.4
  Top Layer w10: v1(752,1799.68) 752,1865.6 v1(754,1867.6) ; v1(869,1728) 936,1728 961,1703 961,1662 1065.99,1557.01 v1(1065.99,1457.26)
  Bottom Layer w10: R1.1 718,2262 754,2226 v1(754,1867.6) ; v1(752,1799.68) 752,1760 766.94,1745.06 851.94,1745.06 v1(869,1728) ; IC1.28 1064.56,1409.52 1064.56,1455.82 v1(1065.99,1457.26)
SWCLK: IC1.37 J1.3 | length 260.8
  Bottom Layer w10: J1.3 668,1375 705,1375 712,1382 712,1442 737.73,1467.73 IC1.37
SWDIO: IC1.34 J1.2 | length 341.6
  Top Layer w10: v1(871,1414) 945,1414 954,1423 v1(954,1453)
  Bottom Layer w10: J1.2 810,1320 833,1343 833,1395.6 851.4,1414 v1(871,1414) ; IC1.34 946.45,1409.52 946.45,1445.45 v1(954,1453)
SYNC: IC1.16 U6.5 | length 525.3
  Top Layer w10: v1(1231.45,1625.21) 1231.45,2009.59 1240.59,2018.73 1240.59,2019.59 v1(1249,2028)
  Bottom Layer w10: IC1.16 v1(1231.45,1625.21) ; U6.5 1241.39,2039.83 1249,2032.22 v1(1249,2028)
Temp: C22.1 IC1.13 J2.4 | length 1833.6
  Top Layer w10: v1(1308.56,2385) 1309.06,2384.5 1507.5,2384.5 v1(1508,2384)
  Bottom Layer w10: IC1.13 1182.09,1684 1230.35,1684 1248.35,1666 1276.52,1666 1302.52,1692 C22.1 1346,1732 1520.63,1732 1551,1762.37 1551,2341 v1(1508,2384) ; J2.4 1259.84,2889.35 1309,2840.19 1309,2385.44 v1(1308.56,2385)
UP: C12.1 IC1.41 R2.1 SW1.2 | length 1961.6
  Top Layer w10: v1(716.24,1878) 716.24,1858.35 726,1848.59 726,1821 716.24,1811.24 716.24,1571.76 v1(727,1561)
  Bottom Layer w10: SW1.2@127.95,2842.69 383.86,2842.69 384.02,2842.84 462.84,2842.84 C12.1 463.16,2842.84 519.84,2842.84 R2.1 633.69,2842.69 688.28,2788.09 688.28,2241.34 716.24,2213.39 v1(716.24,1878) ; v1(727,1561) 741.53,1546.47 IC1.41
USB_DM: IC1.32 R12.2 | length 1265.4
  Bottom Layer w10: IC1.32 985.47,1295.47 854,1164 854,439.63 955.63,338 1025,338 R12.2
USB_DP: IC1.33 R13.2 | length 1288.8
  Bottom Layer w10: IC1.33 965.79,1298.41 838,1170.63 838,433 949,322 1025.32,322 R13.2
V_BUS: C19.1 IC1.11 R27.1 | length 723
  Top Layer w10: v1(1264.1,1700) 1264.1,1703.96 1249.1,1718.97 1249.1,1977.1 1277,2005 v1(1277,2048)
  Bottom Layer w10: IC1.11 1103.79,1742.61 1103.79,1708.21 1110,1702 1156.52,1702 1156.69,1702.17 1157.4,1702.17 1191,1735.77 C19.1@1191,1745.06 ; C19.1 1190,1746.06 C19.1@1191,1745.06 ; v1(1264.1,1700) 1236.06,1700 C19.1@1191,1745.06 ; v1(1277,2048) 1277,2091 1301,2115 1301,2149 R27.1
VBUS: J2.2 R28.2 | length 619.9
  Bottom Layer w12: R28.2@1359.84,2322.22 J2.2
Vset: C17.2 IC1.10 R18.2 R30.2 | length 417.3
  Top Layer w10: v1(975.22,1787.22) 1112.78,1787.22 v1(1113,1787)
  Bottom Layer w10: R30.2 923,1944 R18.2 924.09,1828.85 C17.2 975.22,1828.85 v1(975.22,1787.22) ; IC1.10 1084.24,1743.17 1084.24,1777.24 1094.16,1787.16 1112.84,1787.16 v1(1113,1787)
VUC: C5.2 C6.2 C7.2 C9.2 IC1.9 IC1.24 IC1.36 IC1.48 J1.1 L3.1 R2.2 R6.1 R11.2 R14.2 R15.2 R16.2 | length 5157.3
  Top Layer w10: v1(431,1431) 431,1243 525,1149 v1(525,947) ; v1(431,1523) 431,1525.04 429,1527.04 429,1959 469.16,1999.16 v1(521,1999.16) ; v1(521,2136) v1(521,2348) ; v1(525,561) 525,368 v1(526,367) ; v1(603,1707.2) v1(652.71,1707.2) ; v1(871,1375) 953,1375 990,1412 v1(990,1456) ; v1(1064.21,1681.71) 1063.93,1682 v1(992,1682) 1104.2,1569.8 1104.2,1508.73 1122,1490.93 v1(1122,1459)
  Bottom Layer w10: v1(431,1431) v1(431,1523) ; R16.2@520,423 526,417 v1(526,367) ; R14.2 521,2191.13 v1(521,2136) v1(521,1999.16) 521,1933.78 529.78,1925 R11.2 594,1925 603,1916 v1(603,1707.2) ; R2.2 520,2349 v1(521,2348) ; R15.2 525,1003 v1(525,947) v1(525,561) ; v1(652.71,1707.2) 657.41,1702.5 761.5,1702.5 C6.2 782.39,1684.61 847.83,1684.61 IC1.48 904.5,1684.27 918.56,1670.2 975.99,1670.2 987.78,1682 v1(992,1682) ; J1.1 853,1270 873,1290 C9.2 ; v1(871,1375) 872,1374 872,1333 C9.2 ; IC1.36 906.73,1369.67 873,1335.94 C9.2 ; v1(990,1456) 990,1489.5 1002.5,1502 1079,1502 v1@1113.27,1467.73 ; v1(1064.21,1681.71) IC1.9 1064.21,1783.28 1105,1824.06 C7.2 1157,1828 L3.1 1158,1925.69 1139.69,1944 R6.1 ; v1(1122,1459) v1@1113.27,1467.73 ; C5.2@1261,1431 1189,1431 1181.82,1438.18 IC1.24 v1@1113.27,1467.73
pads on no net: IC1.1 IC1.2 IC1.3 IC1.4 IC1.5 IC1.6 IC1.26 IC1.27 IC1.29 J3.1 J3.4 M1.0 M1.3 M1.7 M1.8 M1.9 M1.10 M1.15 M1.16 RP1.4 RP1.5 U3.5 U6.2 U6.3

## Polygon pours and split planes (outlines as drawn)
GND on Top Layer "Top Layer-GND" (solid, pour order 0): 0,3149.61 2047.24,3149.61 2047.24,0 0,0

## Other copper
Top Layer:
  rectangle net GND: 1006.7,22 1538,123
Bottom Layer:
  rectangle: 563,1248 609,1293.27
  rectangle net GND: 935,2 1604,199
  region: 944,199
  text "Electronic load HMI 1.0" at 2005,1234.71 h90 r90

## Silkscreen, mask and mechanical layers (free items; w line width, h text height)
Top Overlay:
  lines w10: -220,1573 980,1573 ; 1043,1505 1131,1505 ; 1068.65,1573 2077,1573 ; 1087,1456 1087,1505
Bottom Solder:
  rectangle: 563,1248 609,1293.27
  text "Electronic load HMI 1.0" at 2005,1234.71 h90 r90
Mechanical 1:
  lines w7: 0,0 2047.24,0
  lines w10: 0,0 0,3149.61 2047.24,3149.61 2047.24,0 0,0

## Dimensions
0,0 to 2047.24,0 on Mechanical 2
2047.24,0 to 2047.24,3149.61 on Mechanical 2